# Altium PCB ESP32PCB.PcbDoc (part 3 of 3)
Units mil, origin at the board's own origin, x right, y up, seen from the top; angles counter-clockwise.
Board outline 2685 x 1054.88 mil, 4 copper layers (L1, L2, L3, L4), stack 52.058 mil thick; 64 components, 73 nets, 299 pads, 160 vias.
Unrouted connection lines stored in the file: 2.
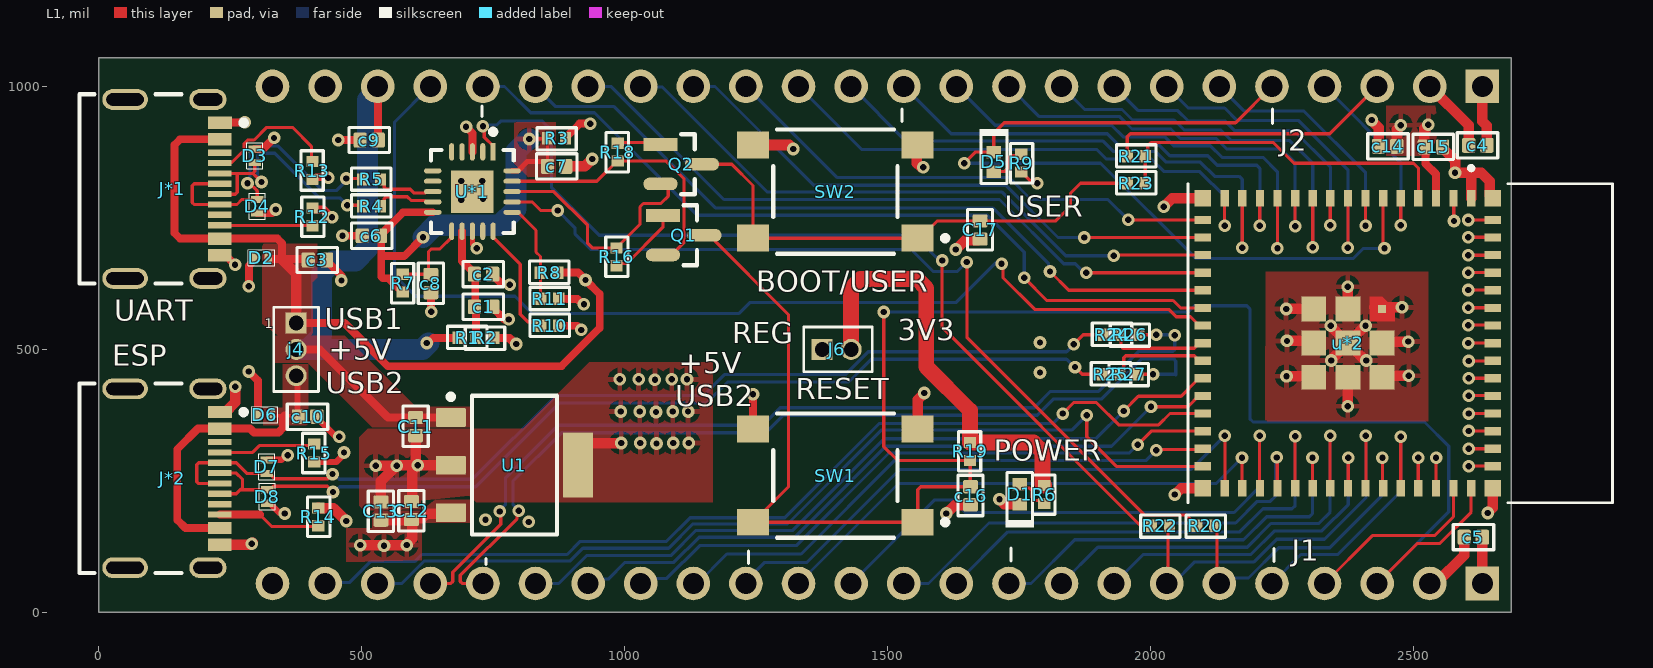
[diagram p0: L1 view]

## Via types
v1: diameter 24, hole 12, L1 to L4, tented both sides, 160 vias

## Nets (pads, with @x,y where several pads share a name; then routed paths per layer and width w, separated by ;. In a path a pad name is that pad's centre, name@x,y a point inside that pad or via, vN(x,y) a via of type N, cw(c..) or ccw(c..) an arc to the next point about the centre after c; other vN are vias at no path point) (continued)
RXD_FTDI: (continued)
  L4 w6: v1(730,924) 732.68,926.68 756.47,926.68 763.79,934 843,934 860.7,916.3 860.7,807.3 951,717 1549.64,717 1591.23,675.41 1592.8,675.41 1599.21,669 v1(1603,669)
TXD_FTDI: R20.2 U*1.17 | length 1662.3
  L1 w6: U*1.17 823.69,780.32 840,764 v1(872,764) ; v1(1650,666) 1650,523 1987.5,185.5 2066.5,185.5 2080.19,171.81 2081.37,171.81 2087,166.18 R20.2
  L4 w6: v1(872,764) 904.84,731.16 904.84,720.16 935,690 1544,690 1586,648 1632,648 v1(1650,666)
U0RXD: J1.6 R20.1 u*2.40 | length 616.9
  L1 w6: R20.1 2125.51,160.51 2125.51,59.49 J1.6 ; u*2.40@2440.06,241.39 v1@2440.06,293.94
  L4 w6: J1.6 2140.33,65.33 2185.33,65.33 2243,123 2340,123 2440,223 v1(2440,294)
U0TXD: J1.7 R22.1 u*2.39 | length 770.1
  L1 w6: J1.7 2032.51,57.51 2032.51,162.49 R22.1 ; u*2.39@2408.59,241.48 v1(2408.59,335.59)
  L4 w6: J1.7 2042,55 2083,96 2196,96 2239,139 2330,139 2408.59,217.59 v1(2408.59,335.59)
VBUS_SENSE: R8.1 R11.1 U*1.16 | length 193.9
  L1 w6: U*1.16 796.72,760.63 831,726.35 831,685 839.48,676.52 839.48,596.5 R11.1
pads on no net: J2.24 J*1.A8 J*1.B8 J*2.A8 J*2.B8 U*1.2 U*1.4 U*1.5 U*1.6 U*1.7 U*1.14

## Polygon pours and split planes (outlines as drawn)
GND on L1 "GND_L01_P023" (solid, pour order 23): 504.42,192.94 495,202.36 495,332.64 511.36,349 805.36,349 932.36,476 1167.36,476 1167.36,249 1167.36,209 1183.36,209 717.36,209 704.36,222 612,212 612,196
+3V3_FTDI on L1 "+3V3_FTDI_L01_P019" (solid, pour order 19): 868,932 868,828 817,828 816,827 790,853 790,933.18
+5V_VBUS2 on L1 "+5V_VBUS2_L01_P022" (solid, pour order 22): 349.17,472.46 349.63,472 398,472 398,354 397,353 394,356 312,356 312,389 349.17,389
+5V_VBUS1 on L1 "+5V_VBUS1_L01_P021" (solid, pour order 21): 310.96,695.5 310.96,549.04 340,527 407,527 406,627 416,637 415,638 415,701 311,701 309,699
+5V on L1 "+5V_L01_P020" (solid, pour order 20): 333,525 334,526 467,526 602,391 706.01,391 706.01,352 520,352 397,475 332,475
GND on L1 "GND_L01_P017" (solid, pour order 17): 2218.54,648 2527,648 2527,363 2217.49,363
+3V3 on L1 "+3V3_L01_P018" (solid, pour order 18): 2447,868.16 2529.6,868.16 2547.56,917.44 2540.38,963.16 2447,963.16
+3V3_REG on L1 "3" (solid, pour order 15): 470,160 470,96.53 505.47,96.53 614,99.58 614,170 681,170 706,170 706,214.3 639.73,214.3 611.68,193 521,193 520,192 520,160
GND on L2 "GND_L02_P036" (solid, pour order 36): 3.64,6.47 2671.47,6.47 2677,12 2677,1042 8,1042 4,1046
+3V3 on L2 "+3V3_L02_P035" (solid, pour order 35): 2672,18 2672,1038 2667,1033 1182,1033 1182,810 1249,743 1402,743 1402,476 1404,474 1472,474 1472,745 1474,743 1787,743 1787,749 1875,837 2456,837 2522,771 2522,184 2383,184 2288,89 2288,11
+3V3_REG on L2 "+3V3_REG_L02_P026" (solid, pour order 26): 484,157.5 601,157.5 616,142.5 608,134.5 608,94.5 483,94.5 460,117.5 466,123.5 466,156.5
GND on L3 (split plane): 2664.9,20.1 20.1,20.1 20.1,1034.78 2664.9,1034.78

## Silkscreen, mask and mechanical layers (free items; w line width, h text height)
Top Overlay:
  lines w6: 728,943 728,963 ; 736,91 736,102 ; 1235,93 1235,117 ; 1527,933 1527,957 ; 1734,98 1734,122 ; 2231,930 2231,957 ; 2234,97 2234,121
  text "J2" at 2245,878 h40
  text "USER" at 1722,752 h40
  text "BOOT/USER" at 1250,609.71 h40
  text "UART" at 29,554 h40
  text "USB1" at 429,538 h40
  text "3V3" at 1519,517 h40
  text "REG" at 1204,512 h40
  text "+5V" at 437,480 h40
  text "ESP" at 25,469 h40
  text "+5V" at 1102,455 h40
  text "USB2" at 431,417 h40
  text "RESET" at 1325,405 h40
  text "USB2" at 1096,392 h40
  text "POWER" at 1701,288 h40
  text "J1" at 2268,98 h40
Bottom Overlay:
  text "IO2" at 2243,936 h40 r90
  text "IO6" at 1846,934 h40 r90
  text "IO3" at 2143,933 h40 r90
  text "IO0" at 2431,933 h40 r90
  text "IO8" at 1654,932 h40 r90
  text "IO7" at 1757,932 h40 r90
  text "IO5" at 1945,932 h40 r90
  text "IO4" at 2054,932 h40 r90
  text "IO1" at 2345,931 h40 r90
  text "NC" at 341,930 h40 r90
  text "3V3" at 2550,930 h40 r90
  text "GND" at 2666,929 h40 r90
  text "IO18" at 649,928 h40 r90
  text "IO9" at 1546,927 h40 r90
  text "GND" at 448,926 h40 r90
  text "IO10" at 1448,926 h40 r90
  text "5V" at 546,924 h40 r90
  text "IO17" at 748,923 h40 r90
  text "IO13" at 1147,922 h40 r90
  text "IO11" at 1349,922 h40 r90
  text "IO16" at 849,921 h40 r90
  text "IO12" at 1248,921 h40 r90
  text "IO14" at 1049,919 h40 r90
  text "IO15" at 937,915 h40 r90
  text "<---PIN1--->" at 2650,741 h40 r90
  text "DESIGNED BY MAYANK" at 1788,529 h40
  text "USB-" at 651,268 h40 r90
  text "USB+" at 746,266 h40 r90
  text "IO33" at 1047,237 h40 r90
  text "IO48" at 554,236 h40 r90
  text "IO34" at 1141,234 h40 r90
  text "IO47" at 451.53,232.88 h40 r90
  text "GND" at 350,232 h40 r90
  text "IO26" at 948,229 h40 r90
  text "IO35" at 1243,229 h40 r90
  text "IO38" at 1545,229 h40 r90
  text "IO21" at 852,228 h40 r90
  text "IO37" at 1445,228 h40 r90
  text "IO40" at 1743,228 h40 r90
  text "IO41" at 1842,228 h40 r90
  text "IO42" at 1961,228 h40 r90
  text "GND" at 2555,228 h40 r90
  text "IO46" at 2348,227 h40 r90
  text "IO45" at 2252,226 h40 r90
  text "IO39" at 1643,225 h40 r90
  text "IO36" at 1346,224 h40 r90
  text "EN" at 2452,222 h40 r90
  text "3V3" at 2655,222 h40 r90
  text "TXD" at 2045,220 h40 r90
  text "RXD" at 2143,217 h40 r90
Board Shape:
  lines w20: -3,1055 -1,1053 -1,0 2687,0 2692,5 2692,1055 -3,1055

## Text inside footprints (layer, text, board x,y; h text height)
J1: Bottom Overlay "1" at 2610,-35 h40 r270
J2: Bottom Overlay "1" at 2608,1068 h40 r270
j4: Top Overlay "1" at 315,540 h18